# Altium PCB CW308T_ADUCM3029.PcbDoc
Units mil, origin at the board's own origin, x right, y up, seen from the top; angles counter-clockwise.
Board outline 2055 x 2540 mil, 2 copper layers (Top Layer, Bottom Layer); 9 components, 28 nets, 144 pads, 87 vias.
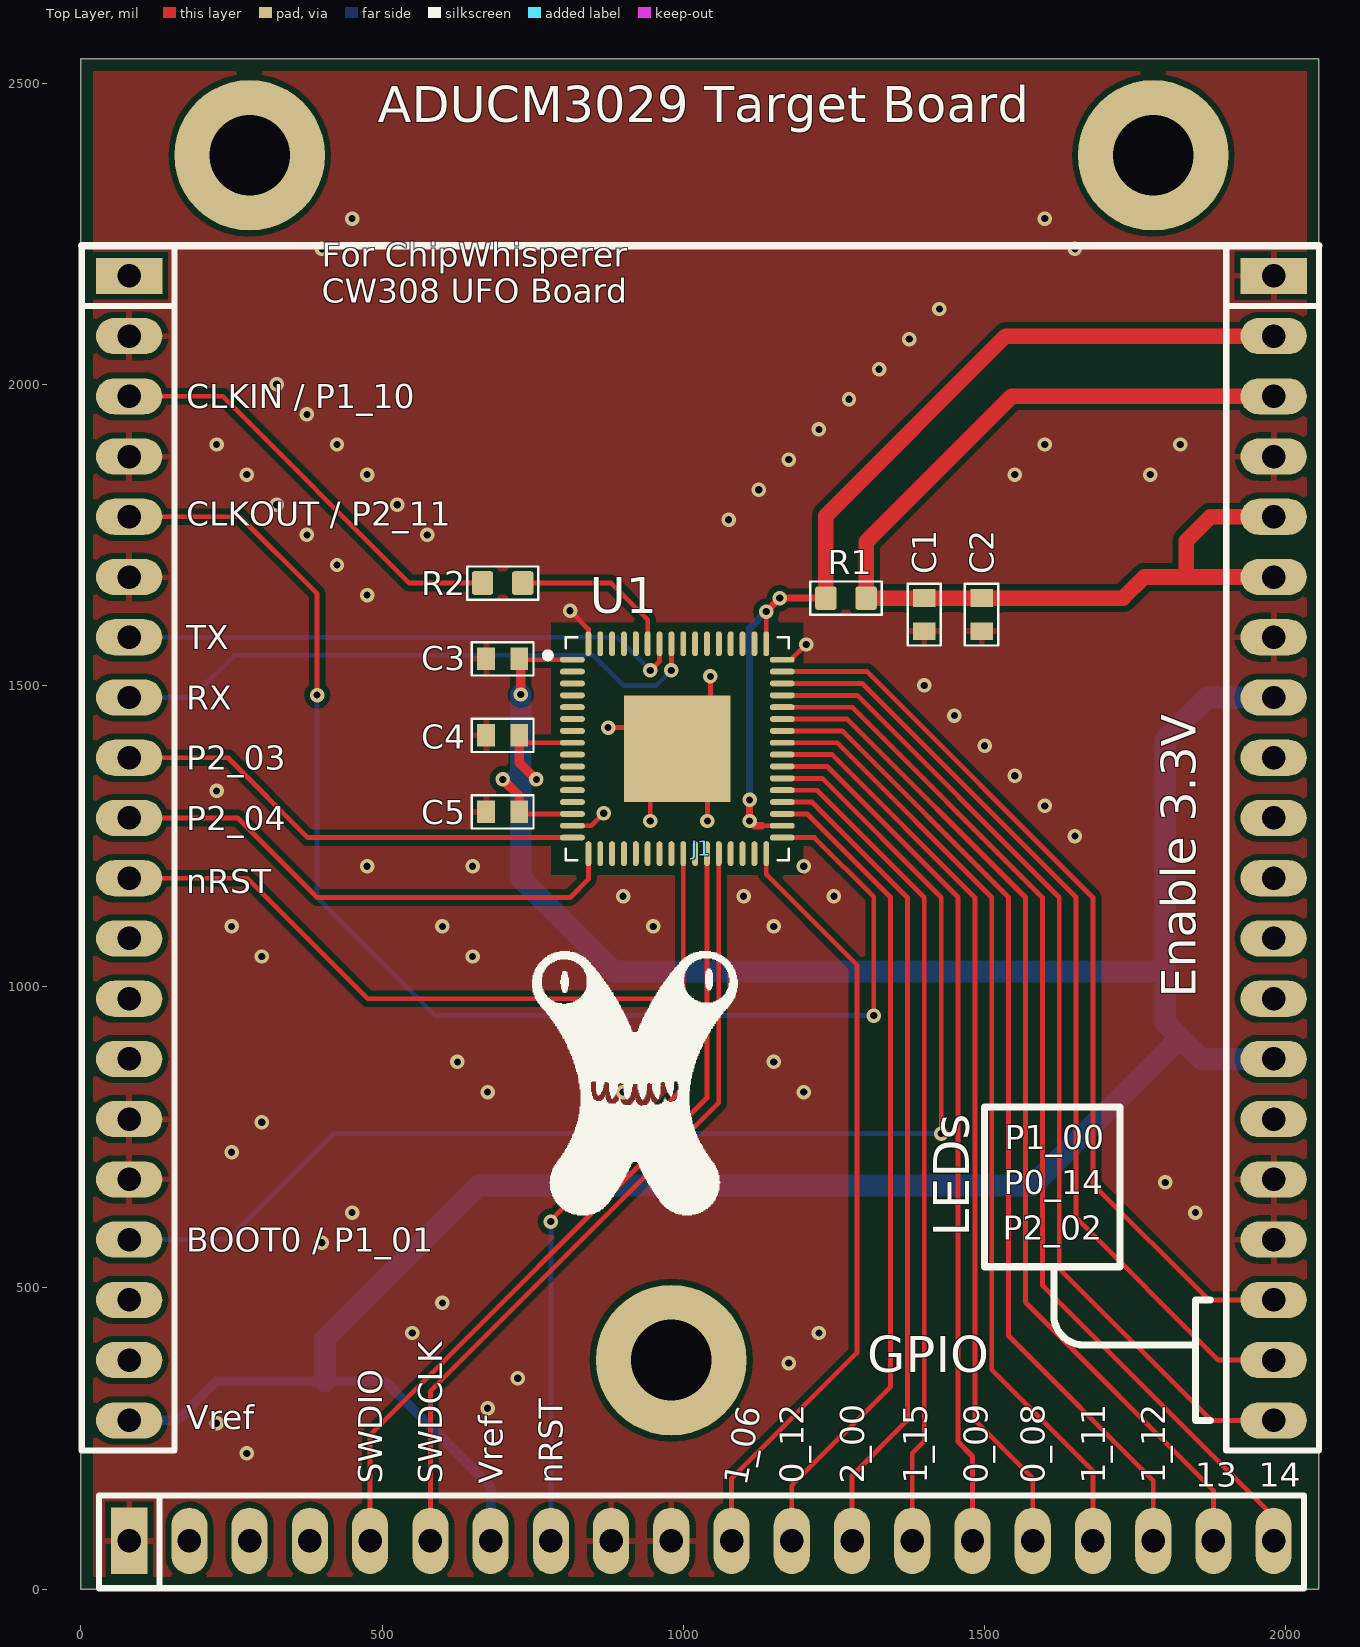
[diagram p0: Top Layer view]
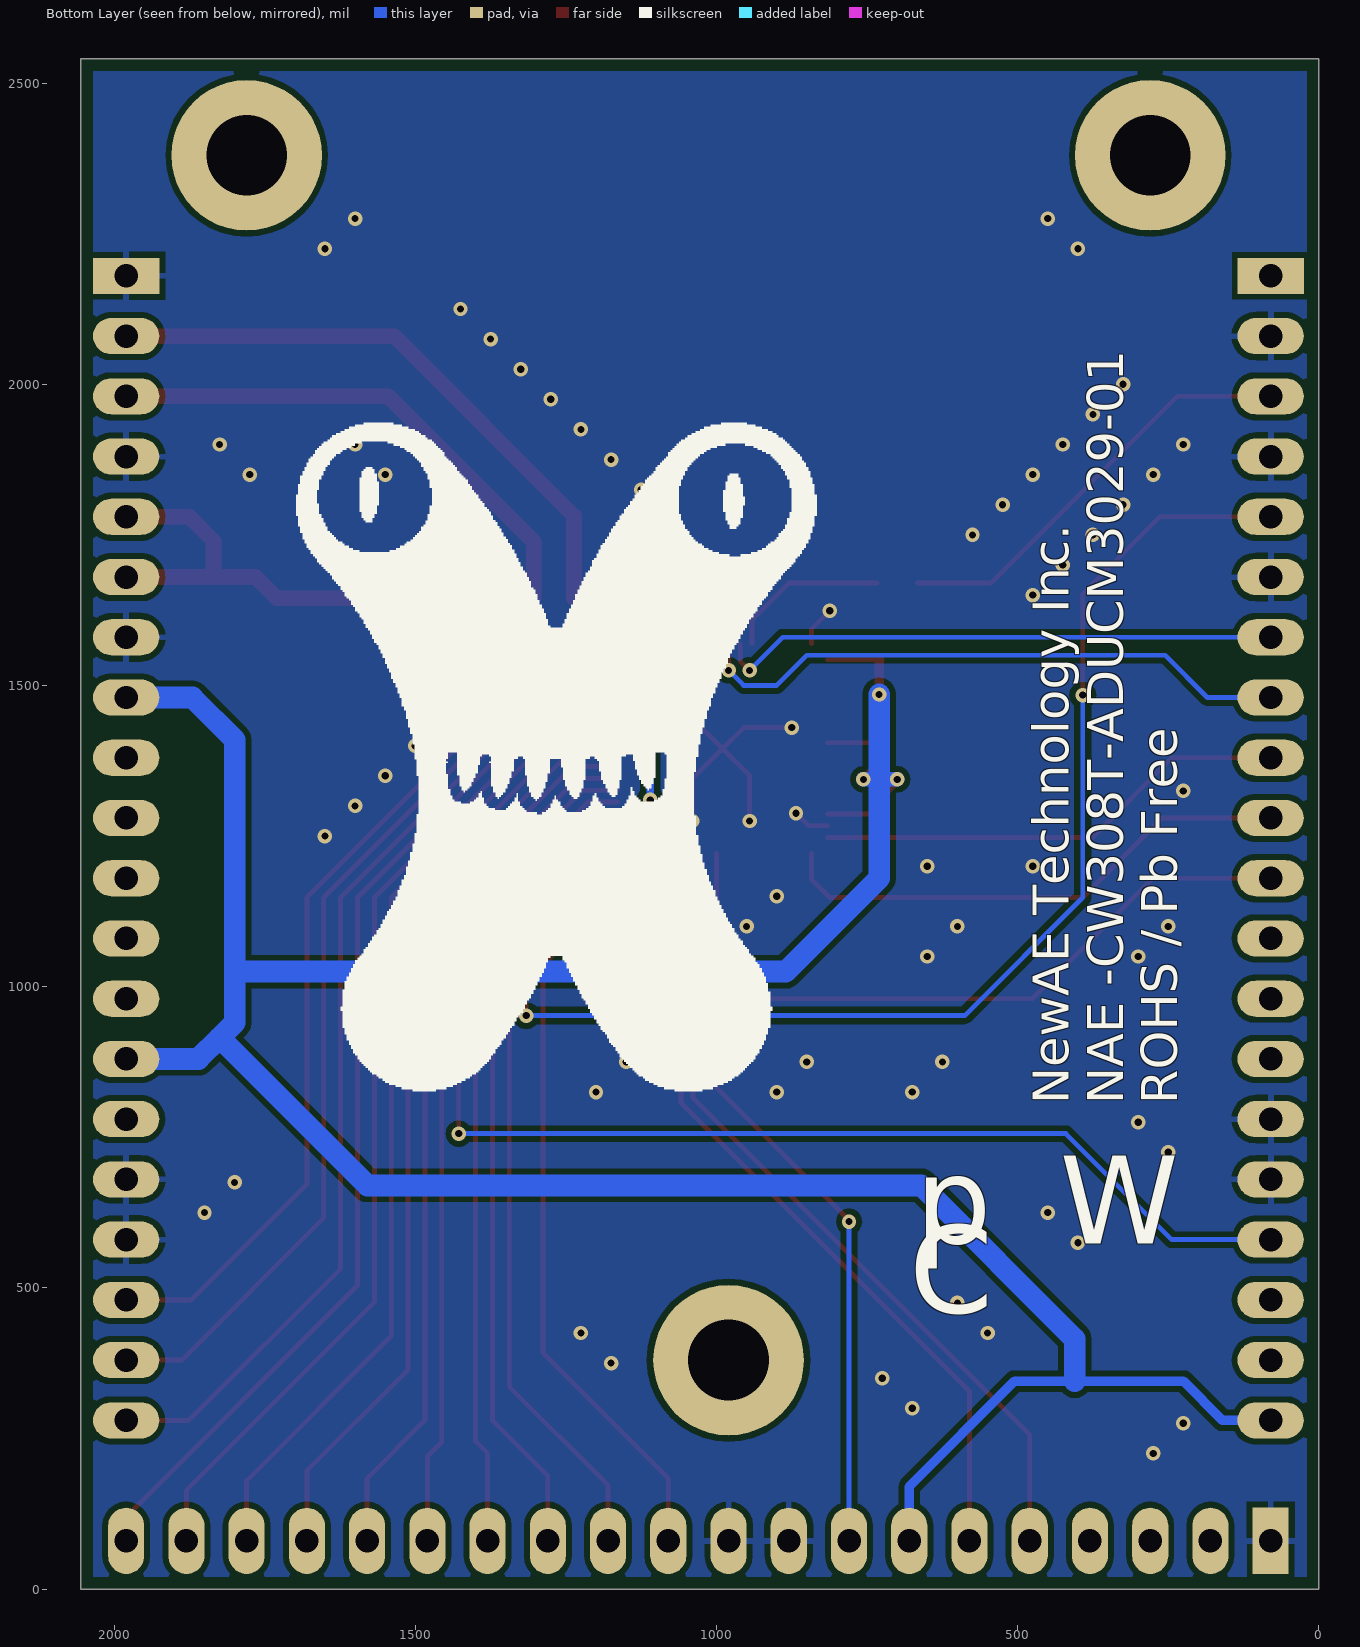
[diagram p1: Bottom Layer view, seen from below]

## Layer stack, top to bottom
Top Solder: solder mask 0.4, Solder Resist, Dk 3.5
Top Layer: signal copper 1.4
Dielectric 1: dielectric 12.6, FR-4, Dk 4.8
Bottom Layer: signal copper 1.4
Bottom Solder: solder mask 0.4, Solder Resist, Dk 3.5

## Board outline
0,0 2055,0 2055,2540 0,2540

## Design rules (kind name [scope] priority, off if disabled: settings)
BoardOutlineClearance Silk_to_Outline [(OnLayer('Top Overlay'))] p1: gap=0 ignorepadtopadclearanceinfootprint=FALSE
BoardOutlineClearance [All] p2: gap=20 ignorepadtopadclearanceinfootprint=FALSE
Clearance Clearance_Power [InNet('+*') OR InNet('-*') OR InNet('GND')] p1: gap=10 ignorepadtopadclearanceinfootprint=FALSE
Clearance [All] p2: gap=6 ignorepadtopadclearanceinfootprint=FALSE except(0: Arc-Hole Track-Hole SMDPad-Hole THPad-Hole Via-Hole Fill-Hole Poly-Hole Region-Hole Text-Hole)
HoleSize [All] p1: absolutevalues=TRUE maxlimit=200 minlimit=1 maxpercent=80.000 minpercent=20.000
MinimumSolderMaskSliver [All] p1: minsoldermaskwidth=5
PlaneConnect PlaneConnect_viaDirect [IsVia] p1: planeconnectstyle=Direct reliefexpansion=20 reliefentries=4 reliefconductorwidth=10 reliefairgap=10
PlaneConnect [All] p2: planeconnectstyle=Relief reliefexpansion=20 reliefentries=4 reliefconductorwidth=10 reliefairgap=10
PolygonConnect PolygonConnect_viaDirect [All vs isVia] p1: connectstyle=Direct reliefconductorwidth=10 reliefentries=4 polygonreliefangle="90 Angle" airgapwidth=10
PolygonConnect [All] p2: connectstyle=Relief reliefconductorwidth=10 reliefentries=4 polygonreliefangle="90 Angle" airgapwidth=10
RoutingVias [All] p1: holewidth=28 width=50 viastyle="Through Hole" minholewidth=28 minwidth=50 maxholewidth=28 maxwidth=50 useviatemplates=TRUE viatemplateguid#1={9E63DBAA-F75C-47FA-A6C3-2AF13BBCD9EC} viatemplateguid#2={F8CC5B79-C749-4627-A632-BFFC10331516} viatemplateguid#3={50B020FA-6E43-4771-91E6-F72EBD98C75A} viatemplatename#1=v61h30m0mx0 viatemplatename#2=v86h41m0mx0 viatemplatename#3=v127h71m0mx0
SilkToSilkClearance [All] p1: silktosilkclearance=5
SilkToSolderMaskClearance [IsPad] p1: minsilkscreentomaskgap=5 clearancetoexposedcopper=TRUE
SolderMaskExpansion [All] p1: expansion=4
Width [All] p1: maxlimit=100 minlimit=6 preferedwidth=8 minimp=50.000000 maximp=50.000000 favimp=50.000000
25 further rules are at their usual default settings.

## Classes and differential pairs
component class CW308T_ADUCM3029_UFO: J1
component class CW308T_ADUCM3029: C1 C2 C3 C4 C5 R1 R2 U1

## Components (designator, comment, footprint, x,y, rotation, side; value= is the part's Value field where it differs from the comment)
C1 "100n" CAPC0603_M 1400,1617.44 r270 top
C2 "2u2" CAPC0603_M 1495,1617.44 r270 top
C3 "100n" CAPC0603_M 700,1543.99 r180 top
C4 "100n" CAPC0603_M 700,1416.99 r180 top
C5 "100n" CAPC0603_M 700,1290 r180 top
J1 "CW308_TARGETCON" CW308_TBOARD_CONN 80,2180 r0 top locked
R1 "12R" RESC1608X55N 1270,1645 r0 top
R2 "33R" RESC1608X55N 700,1670 r0 top
U1 "ADUCM3029" LFCSP-64 990,1395 r0 top

## Footprints (in the part's own frame and the unit in brackets; to place one, negate y for a bottom-side part, rotate by r counter-clockwise, add the part's x,y. Pads: shape width x height; smd on the part's side, far side on the other; paste and mask are expansions set on the pad)
CAPC0603_M [mm]
  rect 0.75x0.95 smd: 1(-0.7,0) 2(0.7,0)
  silkscreen extent -1.3,-0.7 1.3,0.7, body extent -0.85,-0.45 0.85,0.45, height 0.9
CW308_TBOARD_CONN [mil]
  rect 110x60 hole 39: A1(0,0) C1(1900,0)
  oval 110x60 hole 39: A2(0,-100) A3(0,-200) A4(0,-300) A5(0,-400) A6(0,-500) A7(0,-600) A8(0,-700) A9(0,-800) A10(0,-900) A11(0,-1000) A12(0,-1100) A13(0,-1200) A14(0,-1300) A15(0,-1400) A16(0,-1500) A17(0,-1600) A18(0,-1700) A19(0,-1800) A20(0,-1900) C2(1900,-100) C3(1900,-200) C4(1900,-300) C5(1900,-400) C6(1900,-500) C7(1900,-600) C8(1900,-700) C9(1900,-800) C10(1900,-900) C11(1900,-1000) C12(1900,-1100) C13(1900,-1200) C14(1900,-1300) C15(1900,-1400) C16(1900,-1500) C17(1900,-1600) C18(1900,-1700) C19(1900,-1800) C20(1900,-1900)
  rect 60x110 hole 39: B1(0,-2100)
  oval 60x110 hole 39: B2(100,-2100) B3(200,-2100) B4(300,-2100) B5(400,-2100) B6(500,-2100) B7(600,-2100) B8(700,-2100) B9(800,-2100) B10(900,-2100) B11(1000,-2100) B12(1100,-2100) B13(1200,-2100) B14(1300,-2100) B15(1400,-2100) B16(1500,-2100) B17(1600,-2100) B18(1700,-2100) B19(1800,-2100) B20(1900,-2100)
  round 250 hole 134: MH1(200,200) MH2(900,-1800) MH2(1700,200)
  silkscreen extent -79,-2179 1975,50, body extent -50,-2149 1950,50, height 48
LFCSP-64 [mm] "QFN, 64-Leads, Body 9.00x9.00mm, Pitch 0.50mm, Thermal Pad 4.50x4.50mm, IPC Low Density"
  oval 1.05x0.25 smd: 1(-4.425,3.75) 2(-4.425,3.25) 3(-4.425,2.75) 4(-4.425,2.25) 5(-4.425,1.75) 6(-4.425,1.25) 7(-4.425,0.75) 8(-4.425,0.25) 9(-4.425,-0.25) 10(-4.425,-0.75) 11(-4.425,-1.25) 12(-4.425,-1.75) 13(-4.425,-2.25) 14(-4.425,-2.75) 15(-4.425,-3.25) 16(-4.425,-3.75) 33(4.425,-3.75) 34(4.425,-3.25) 35(4.425,-2.75) 36(4.425,-2.25) 37(4.425,-1.75) 38(4.425,-1.25) 39(4.425,-0.75) 40(4.425,-0.25) 41(4.425,0.25) 42(4.425,0.75) 43(4.425,1.25) 44(4.425,1.75) 45(4.425,2.25) 46(4.425,2.75) 47(4.425,3.25) 48(4.425,3.75)
  oval 0.25x1.05 smd: 17(-3.75,-4.425) 18(-3.25,-4.425) 19(-2.75,-4.425) 20(-2.25,-4.425) 21(-1.75,-4.425) 22(-1.25,-4.425) 23(-0.75,-4.425) 24(-0.25,-4.425) 25(0.25,-4.425) 26(0.75,-4.425) 27(1.25,-4.425) 28(1.75,-4.425) 29(2.25,-4.425) 30(2.75,-4.425) 31(3.25,-4.425) 32(3.75,-4.425) 49(3.75,4.425) 50(3.25,4.425) 51(2.75,4.425) 52(2.25,4.425) 53(1.75,4.425) 54(1.25,4.425) 55(0.75,4.425) 56(0.25,4.425) 57(-0.25,4.425) 58(-0.75,4.425) 59(-1.25,4.425) 60(-1.75,4.425) 61(-2.25,4.425) 62(-2.75,4.425) 63(-3.25,4.425) 64(-3.75,4.425)
  rect 4.5x4.5 smd paste-20: PAD(0,0)
  silkscreen extent -5.59,-4.7 4.7,4.7, body extent -4.6,-4.6 4.6,4.6, height 0.8
RESC1608X55N [mm] "Chip Resistor, Body 1.6x0.8mm, EIA 0603, IPC Medium Density"
  round 0.254 on Mech15: 0(0,0)
  rrect25% 0.9x1 smd: 1(-0.85,0) 2(0.85,0)
  Top Layer pour cut-out: -0.6,0.5 0.6,0.5 0.6,-0.5 -0.6,-0.5
  silkscreen extent -1.5,-0.7 1.5,0.7, body extent -0.87,-0.47 0.88,0.48, height 0.54

## Part data
C1 C3 C4 C5: library part CCHIP-100n-0603, "100n, 0603", Case-EIA=0603, Case-Metric=1608, Manufacture 1=Kemet, Manufacture Part Number 1=C0603C104K5RACTU, Rated Voltage=50VDC, Supplier Part Number 1=399-5089-2-ND, Component Group=Capacitor, Component Type=Standard, Mounting Technology=SMT, Part Number=CCHIP-100n-0603, Pin Count=2, Supplier 1=Digi-Key
C2: library part CCHIP-2u2-0603, "2u2, 0603", Case-EIA=0603, Case-Metric=1608, Manufacture 1=Samsung, Manufacture Part Number 1=CL10B225KP8NNNC, Rated Voltage=10VDC, Supplier Part Number 1=1276-1134-2-ND, Component Group=Capacitor, Component Type=Standard, Mounting Technology=SMT, Part Number=CCHIP-2u2-0603, Pin Count=2, Supplier 1=Digi-Key
J1: library part CW308_TBOARD, "CW308 \"Standard\" Target Board Connector", Component Group=Mechanical, Component Type=Standard, Mounting Technology=Through-hole, Part Number=CW308_TBOARD, Pin Count=60, Pitch=2.54mm
R1: library part RCHIP-12R-0603, "12R res, 0603, 1%, 1/10W", Case-EIA=0603, Case-Metric=1608, Manufacture 1=Yageo, Manufacture Part Number 1=RC0603FR-0712RL, Rated Power=0.1W, Rated Voltage=75VDC, Supplier Part Number 1=311-12.0HRCT-ND, Temperature Range="-55C to 155C", Tolerance=1%, Component Group=Resistor, Component Type=Standard, Mounting Technology=SMT, Part Number=RCHIP-12R-0603, Pin Count=2, Supplier 1=Digi-Key
R2: library part RCHIP-33R-0603, "33R res, 0603, 1%, 1/10W", Case-EIA=0603, Case-Metric=1608, Manufacture 1=Yageo, Manufacture Part Number 1=RC0603FR-0733RL, Rated Power=0.1W, Rated Voltage=75VDC, Supplier Part Number 1=311-33.0HRCT-ND, Temperature Range="-55C to 155C", Tolerance=1%, Component Group=Resistor, Component Type=Standard, Mounting Technology=SMT, Part Number=RCHIP-33R-0603, Pin Count=2, Supplier 1=Digi-Key
U1: library part ADUCM3029BCPZ, "IC MCU 32BIT 256KB FLASH 64LFCSP", Manufacture 1="Analog Devices Inc.", Supplier Part Number 1=ADUCM3029BCPZ-ND, Component Group="Digital IC", Component Type=Standard, Manufacture Part Number 1=ADUCM3029BCPZ, Mounting Technology=SMT, Part Number=ADUCM3029BCPZ, Pin Count=64, PP Material Stack=0, PP Rotation=0, RoHS=Yes, Supplier 1=Digi-Key

## Via types
v1: diameter 24, hole 12, Top Layer to Bottom Layer, tented both sides, 87 vias

## Nets (pads, with @x,y where several pads share a name; then routed paths per layer and width w, separated by ;. In a path a pad name is that pad's centre, name@x,y a point inside that pad or via, vN(x,y) a via of type N, cw(c..) or ccw(c..) an arc to the next point about the centre after c; other vN are vias at no path point)
+3v3: C3.1 C4.1 C5.1 J1.A20 J1.B7 J1.C8 J1.C14 U1.1 U1.8 U1.14 | length 5345.7
  Top Layer w8: C5.1 730.83,1286.73 U1.14 ; C4.1 739.71,1404.84 U1.8 ; C3.1 728.91,1542.64 U1.1
  Top Layer w16: v1(700,1344) 727.56,1316.44 C5.1 ; C4.1 727.56,1372 755.56,1344 v1(756,1344) ; C3.1@728.91,1542.64 730,1541.55 v1(730,1485)
  Bottom Layer w16: J1.A20 160,280 225,345 405,345 505,345 680,170 J1.B7
  Bottom Layer w24: v1(700,1344) 730,1344 v1(756,1344)
  Bottom Layer w36: 405,345 405,415 660,670 1580,670 1825,915 ; v1(730,1485) 730,1344 730,1180 885,1025 1800,1025 ; J1.C14 1860,880 1825,915 ; J1.C8 1870,1480 1800,1410 1800,1025 ; 1800,1025 1800,940 1825,915
+3v3_CORE: J1.C2 R1.1 U1.34 U1.49 | length 1638.4
  Top Layer w8: 1130,1267.05 U1.34 ; U1.49 v1(1137.64,1622.64)
  Top Layer w12: v1@1110,1300 v1(1110,1275) 1117.95,1267.05 1130,1267.05 ; v1(1137.64,1622.64) v1(1160,1645) R1.1
  Top Layer w26: R1.1 1236.54,1781.54 1535,2080 J1.C2
  Bottom Layer w12: v1(1110,1275) v1(1110,1310) 1110,1595 v1(1137.64,1622.64) v1(1160,1645)
+3v3_FILT: C1.1 C2.1 J1.C3 J1.C5 J1.C6 R1.2 | length 1782.6
  Top Layer w26: J1.C6 1835,1680 ; J1.C5 1875,1780 1835,1740 1835,1680 ; J1.C3 1545,1980 1303.46,1738.46 R1.2 C1.1 C2.1 1730,1645 1765,1680 1835,1680
BOOT0: J1.A17 U1.38 | length 2158.6
  Top Layer w8: U1.38 1230.21,1345.79 1428,1148 v1(1428,756)
  Bottom Layer w8: J1.A17 244,580 420,756 v1(1428,756)
CLKOUT: J1.A5 U1.33 | length 2263.7
  Top Layer w8: J1.A5 264,1780 392,1652 v1(392,1484) ; U1.33 1217.64,1247.36 1316,1149 v1(1316,952)
  Bottom Layer w8: v1(392,1484) 392,1148 588,952 v1(1316,952)
GND: C1.2 C2.2 C3.2 C4.2 C5.2 J1.A2 J1.A4 J1.A6 J1.A15 J1.A16 J1.B1 J1.B9 J1.B10 J1.C1 J1.C4 J1.C7 J1.C16 J1.C17 U1.15 U1.48 U1.64 U1.PAD | length 730.2
  Top Layer w8: v1(812,1624) 842.36,1593.64 U1.64 ; U1.15 847.05,1267.05 v1(868,1288) ; v1(875,1430) 955,1430 U1.PAD ; v1(945,1275) 945,1350 U1.PAD ; v1(1040,1275) 1040,1345 U1.PAD ; v1(1045,1515) 1045,1450 U1.PAD ; U1.48 1178.64,1542.64 v1(1204,1568)
  other v1: 275,225 225,275 675,300 725,350 1175,375 550,425 1225,425 600,475 400,575 450,625 1850,625 1800,675 250,725 300,775 675,825 900,825 1200,825 625,875 850,875 1150,875 300,1050 650,1050 250,1100 600,1100 950,1100 1150,1100 900,1150 1100,1150 1250,1150 475,1200 650,1200 1200,1200 1650,1250 1600,1300 225,1325 1550,1350 1500,1400 1450,1450 1400,1500 475,1650 425,1700 375,1750 575,1750 1075,1775 325,1800 525,1800 1125,1825 275,1850 475,1850 1550,1850 1775,1850 1175,1875 225,1900 425,1900 1600,1900 1825,1900 1225,1925 375,1950 1275,1975 325,2000 1325,2025 1375,2075 1425,2125 400,2225 1650,2225 450,2275 1600,2275
GPIO1: J1.A7 U1.58 | length 938.4
  Top Layer w8: v1(945,1525) 960.47,1540.47 U1.58
  Bottom Layer w8: J1.A7 890,1580 v1(945,1525)
GPIO2: J1.A8 U1.57 | length 1004.3
  Top Layer w8: v1(980,1525) 980.16,1525.16 U1.57
  Bottom Layer w8: J1.A8 185,1480 255,1550 850,1550 900,1500 955,1500 v1(980,1525)
GPIO3: J1.A9 U1.16 | length 790.7
  Top Layer w8: J1.A9 244,1380 376.64,1247.36 U1.16
GPIO4: J1.A10 U1.17 | length 872
  Top Layer w8: J1.A10 260,1280 392,1148 812,1148 842.36,1178.36 U1.17
H1: J1.B11 U1.32 | length 1289.2
  Top Layer w8: J1.B11 1080,184 1288,392 1288,1036 1137.64,1186.36 U1.32
H2: J1.B12 U1.35 | length 1373.2
  Top Layer w8: U1.35 1205.27,1286.73 1344,1148 1344,336 1180,172 J1.B12
H3: J1.B13 U1.36 | length 1379.5
  Top Layer w8: U1.36 1213.58,1306.42 1372,1148 1372,280 1280,188 J1.B13
H4: J1.B14 U1.37 | length 1385.8
  Top Layer w8: U1.37 1221.9,1326.1 1400,1148 1400,245 1380,225 J1.B14
H5: J1.B15 U1.39 | length 1459.8
  Top Layer w8: U1.39 1238.53,1365.47 1456,1148 1456,244 1480,220 J1.B15
H6: J1.B16 U1.40 | length 1525.8
  Top Layer w8: U1.40 1246.84,1385.16 1484,1148 1484,280 1580,184 J1.B16
H7: J1.B17 U1.41 | length 1591.8
  Top Layer w8: U1.41 1255.16,1404.84 1512,1148 1512,364 1680,196 J1.B17
H8: J1.B18 U1.42 | length 1657.7
  Top Layer w8: U1.42 1263.47,1424.53 1540,1148 1540,420 1780,180 J1.B18
H9: J1.B19 U1.43 | length 1723.7
  Top Layer w8: U1.43 1271.79,1444.21 1568,1148 1568,476 1880,164 J1.B19
H10: J1.B20 U1.44 | length 1789.7
  Top Layer w8: U1.44 1280.1,1463.9 1596,1148 1596,504 1980,120 J1.B20
LED1: J1.C18 U1.47 | length 1526.6
  Top Layer w8: U1.47 1305.05,1522.95 1680,1148 1680,672 1872,480 J1.C18
LED2: J1.C19 U1.46 | length 1592.7
  Top Layer w8: U1.46 1296.73,1503.27 1652,1148 1652,616 1888,380 J1.C19
LED3: J1.C20 U1.45 | length 1675.2
  Top Layer w8: U1.45 1288.42,1483.58 1624,1148 1624,532 1876,280 J1.C20
NetJ1_A3: J1.A3 R2.1 | length 714.9
  Top Layer w8: J1.A3 235,1980 545,1670 R2.1
NetJ1_A11: J1.A11 J1.B8 U1.25 | length 2234.5
  Top Layer w8: J1.A11 276,1180 476,980 999.84,980 ; v1(780,610) 780,612 999.84,831.84 999.84,980 ; U1.25 999.84,980
  Bottom Layer w8: J1.B8 v1(780,610)
NetR2_2: R2.2 U1.59 | length 272.5
  Top Layer w8: R2.2 880,1670 940.79,1609.21 U1.59
SWDCLK: J1.B6 U1.28 | length 1339.2
  Top Layer w8: J1.B6 580,328 1058.9,806.9 U1.28
SWDIO: J1.B5 U1.27 | length 1372.4
  Top Layer w8: J1.B5 480,256 1039.21,815.21 U1.27
pads on no net: J1.A1 J1.A12 J1.A13 J1.A14 J1.A18 J1.A19 J1.B2 J1.B3 J1.B4 J1.C9 J1.C10 J1.C11 J1.C12 J1.C13 J1.C15 J1.MH1 J1.MH2 R1.0 R2.0 U1.2 U1.3 U1.4 U1.5 U1.6 U1.7 U1.9 U1.10 U1.11 U1.12 U1.13 U1.18 U1.19 U1.20 U1.21 U1.22 U1.23 U1.24 U1.26 U1.29 U1.30 U1.31 U1.50 U1.51 U1.52 U1.53 U1.54 U1.55 U1.56 U1.60 U1.61 U1.62 U1.63

## Polygon pours and split planes (outlines as drawn)
GND on Bottom Layer "GND_L02_P002" (solid, remove dead copper, pour order 2): 0,2540 2050,2540 2050,10 2055,5 0,5
GND on Top Layer "GND_L01_P000" (solid, remove dead copper, pour order 0): 0,2540 2055,2540 2055,0 5,0

## Other copper
Top Layer:
  pour cut-out: 835,1550 1145,1550 1145,1240 830,1240
  pour cut-out: 780,1605 1200,1605 1200,1185 780,1185

## Silkscreen, mask and mechanical layers (free items; w line width, h text height)
Top Overlay:
  drawing of 15 lines, arcs and shapes, not listed
  text "ADUCM3029 Target Board" at 492.77,2435 h60
  text "For ChipWhisperer / CW308 UFO Board" at 400,2135 h40
  text "CLKIN / P1_10" at 175,1960 h40
  text "CLKOUT / P2_11" at 175,1765 h40
  text "TX" at 175,1560 h40
  text "RX" at 175,1460 h40
  text "P2_03" at 175,1360 h40
  text "P2_04" at 175,1260 h40
  text "nRST" at 175,1155 h40
  text "Enable 3.3V" at 1870,981.17 h98.43 r90
  text "P1_00" at 1533.14,730 h40
  text "P0_14" at 1532.19,655 h40
  text "LEDs" at 1475,585 h60 r90
  text "P2_02" at 1530,580 h40
  text "BOOT0 / P1_01" at 175,560 h40
  text "GPIO" at 1305,360 h60
  text "Vref" at 175,265 h40
  text "SWDIO" at 500,175 h40 r90
  text "SWDCLK" at 600,175 h40 r90
  text "Vref" at 700,175 h40 r90
  text "nRST" at 800,175 h40 r90
  text "0_12" at 1200,175 h40 r90
  text "2_00" at 1300,175 h40 r90
  text "1_15" at 1405,175 h40 r90
  text "0_09" at 1505,175 h40 r90
  text "0_08" at 1600,175 h40 r90
  text "1_11" at 1700,175 h40 r90
  text "1_12" at 1800,175 h40 r90
  text "1_06" at 1105,170 h40 r79.7
  text "13" at 1850,170 h40
  text "14" at 1955,170 h40
Bottom Overlay:
  drawing of 3 lines, arcs and shapes, not listed
  text "NewAE Technology Inc. / NAE -CW308T-ADUCM3029-01 / ROHS / Pb Free" at 235,805 h60 r270
  text "W" at 430,525 h250
  text "p" at 670,525 h250
  text "C" at 680,410 h250
Mechanical 1:
  the board outline again, w10